# EAGLE board Eagle_Buzzer (EAGLE 7.2.0)
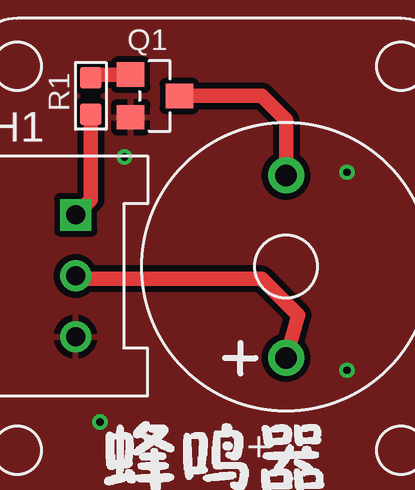
[diagram p0: board, top side]
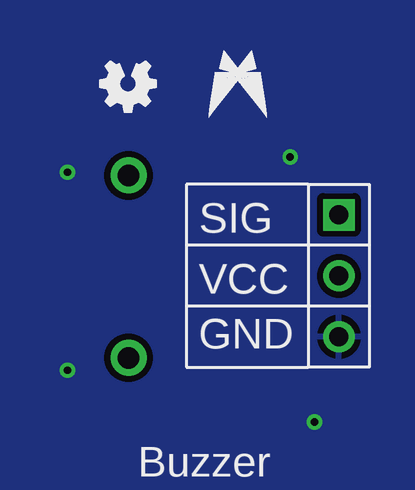
[diagram p1: board, bottom side, seen from below]

No outline drawn. Coordinates in mm, seen from the top.
Copper layers (1*16): Top 0.035mm / dielectric 1.5mm / Bottom 0.035mm
Design rules "SeeedStudio_rule_no_angle_090911": minimum track width 6mil, minimum drill 12mil, track to track 6mil, track to pad 6mil, pad to pad 6mil, via to via 6mil, smd to smd 0mil, copper to edge 10mil, drill to drill 10mil, minimum pad ring 10mil, minimum via ring 6mil, stop-mask expansion 2mil, vias tented up to drill 25mil, thermal gap 10mil

## Footprints (pad centres in the part's own frame; a part is rotated, then mirrored left to right if it is on the bottom)
2P-7.6-D12X6.5H = drill 0.9 pad 1.5: + -3.8,0; - 3.8,0
HEAD_LOCK_3PIN_2 = drill 0.8 square: 1 0,2.54 | drill 0.8: 2 0,0; 3 0,-2.54
SOT23 = smd 1.016 x 1.143: 1 -0.889,-1.016; 2 0.889,-1.016; 3 0,1.016
R0603 = smd 0.889 x 0.889: 1 -0.762,0; 2 0.762,0

## Placement (x,y rotation side)
BUZ1  [2P-7.6-D12X6.5H]  3.56,0.51 90 top
H1  HEAD_LOCK_3PIN_2  [HEAD_LOCK_3PIN_2]  -5.21,0.13 0 top
Q1  S9013  [SOT23]  -1.91,7.62 270 top
R1  1K  [R0603]  -4.57,7.62 90 top
U$4  DIMENSION_2MM2MM  [DIMENSION_2MM*2MM]  -9.65,-9.14 0 top
U$5  XMAKERLOGO_2.5MM_TOP  [XMAKERLOGO_2.5MM_TOP]  -1.02,8.13 180 bottom
U$6  OPENHARDWARE_2.5MM_TOP  [OPENSOURCELOGO_2.5MM]  3.56,8.13 180 bottom
U$7  NAME_BUZZER  [NAME_BUZZER]  0.51,-9.14 0 top

## Library data of the parts
BUZ1 Q1 R1 = Discrete
H1 U$4-U$7 = Xmaker

## Nets
D1: H1.1 R1.1
DRI: BUZ1.- Q1.3
GND: H1.3 Q1.2
N$2: Q1.1 R1.2
VCC: BUZ1.+ H1.2

## Tracks (layer width: path | path; a pad name or v marks a point on that pad's centre or on a via)
D1
  Top 0.61: R1.1 -4.57,3.3 H1.1
DRI
  Top 0.61: Q1.3 2.54,7.62 3.56,6.6 BUZ1.-
GND  (via drill 0.3 pad 0.64)
  other vias: 6.1,4.45 6.1,-3.81 -3.17,5.08 -4.19,-5.97
  pour Top (isolate 0.254): -12.7,-10.16 12.7,-10.16 12.7,11.68 -12.7,11.68
  pour Bottom (isolate 0.254): -12.7,-10.16 12.7,-10.16 12.7,11.68 -12.7,11.68
N$2
  Top 0.61: Q1.1 -4.45,8.51 R1.2
VCC
  Top 0.61: BUZ1.+ 4.06,-1.52 2.54,0 -5.08,0 H1.2

## Text on the board
tPlace: +
bPlace: Buzzer